# EAGLE board driver (EAGLE 9.6.1)
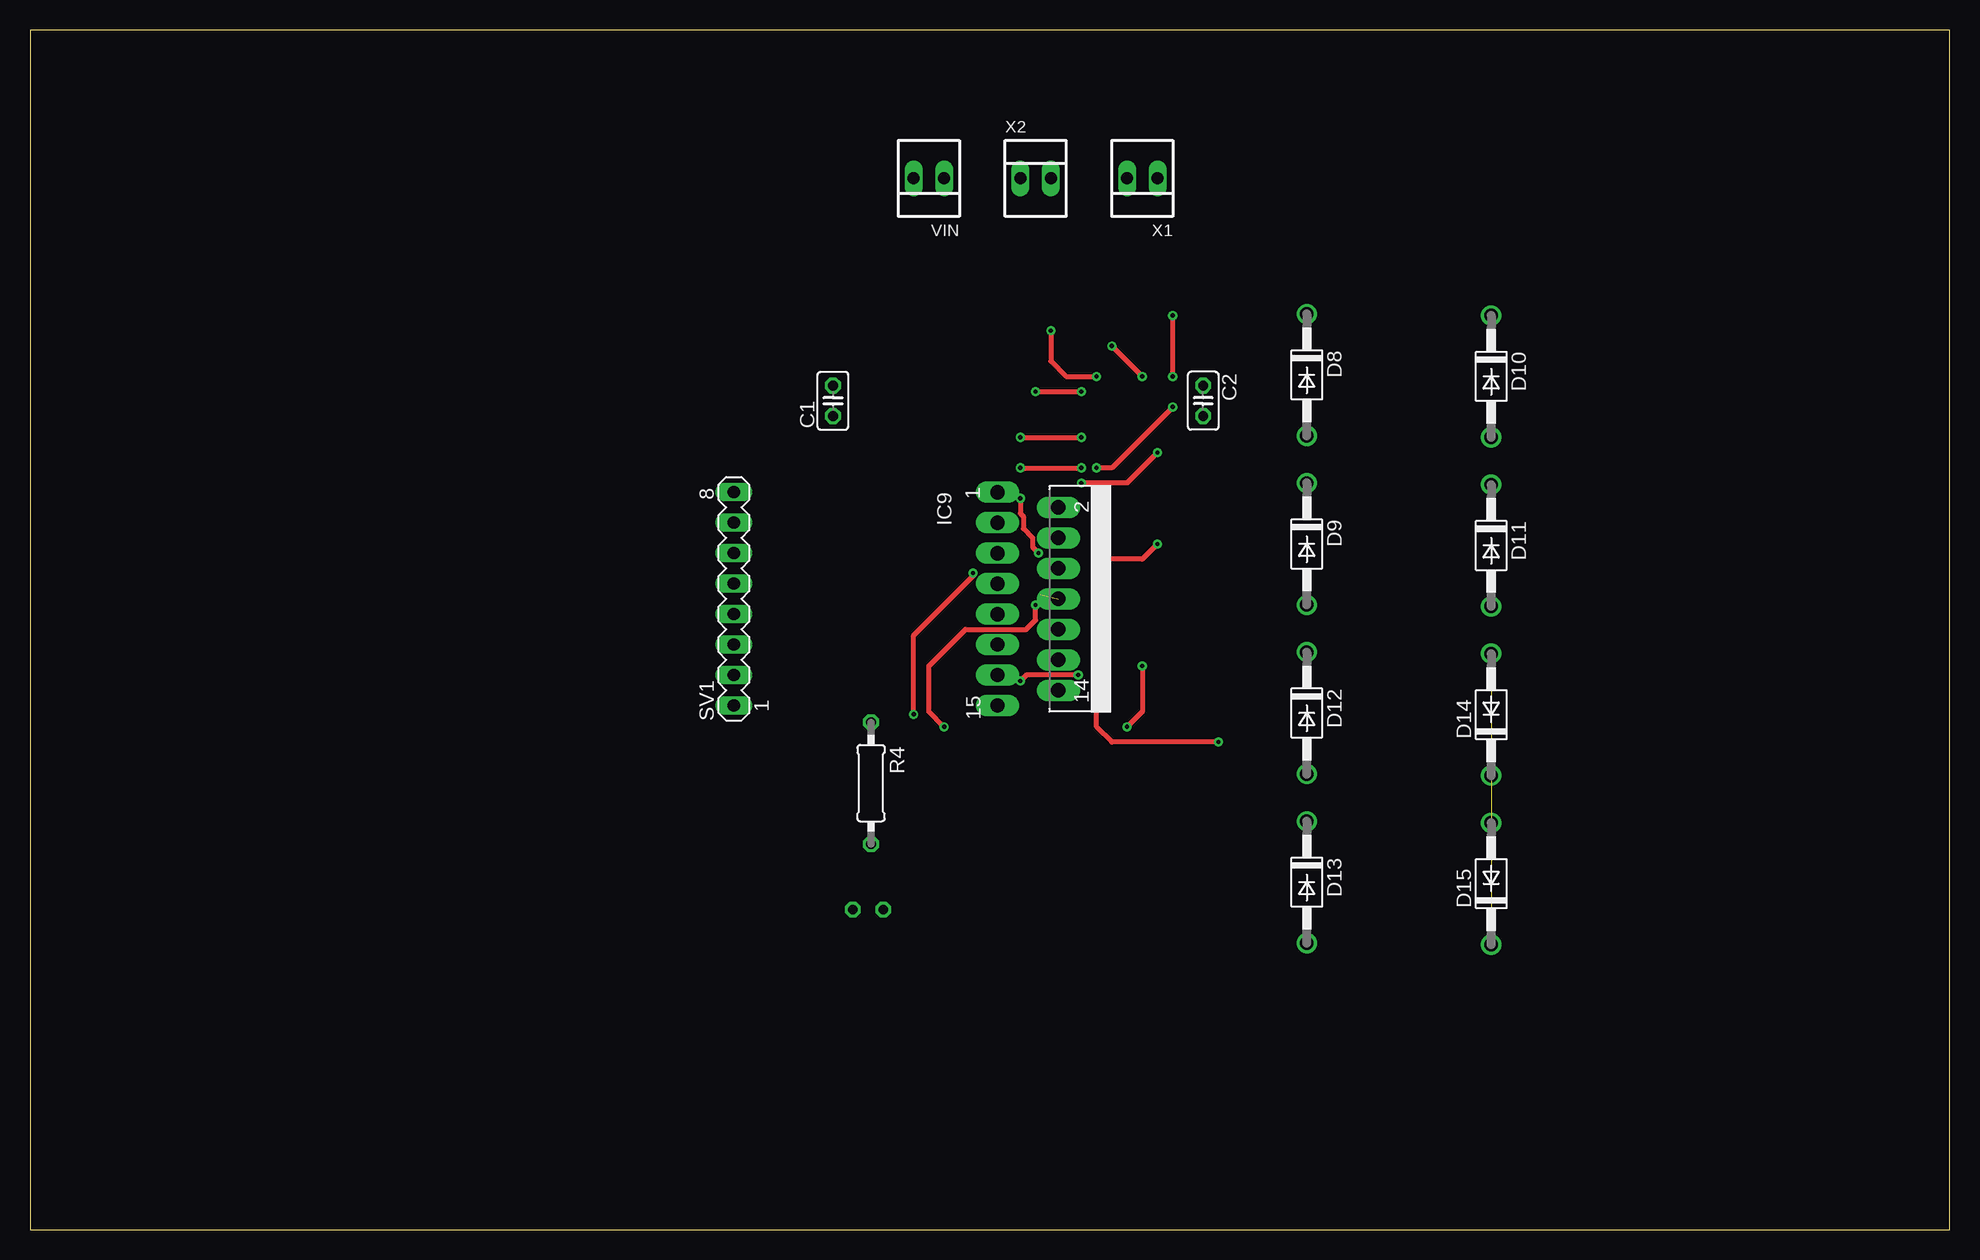
[diagram p0: board, top side]
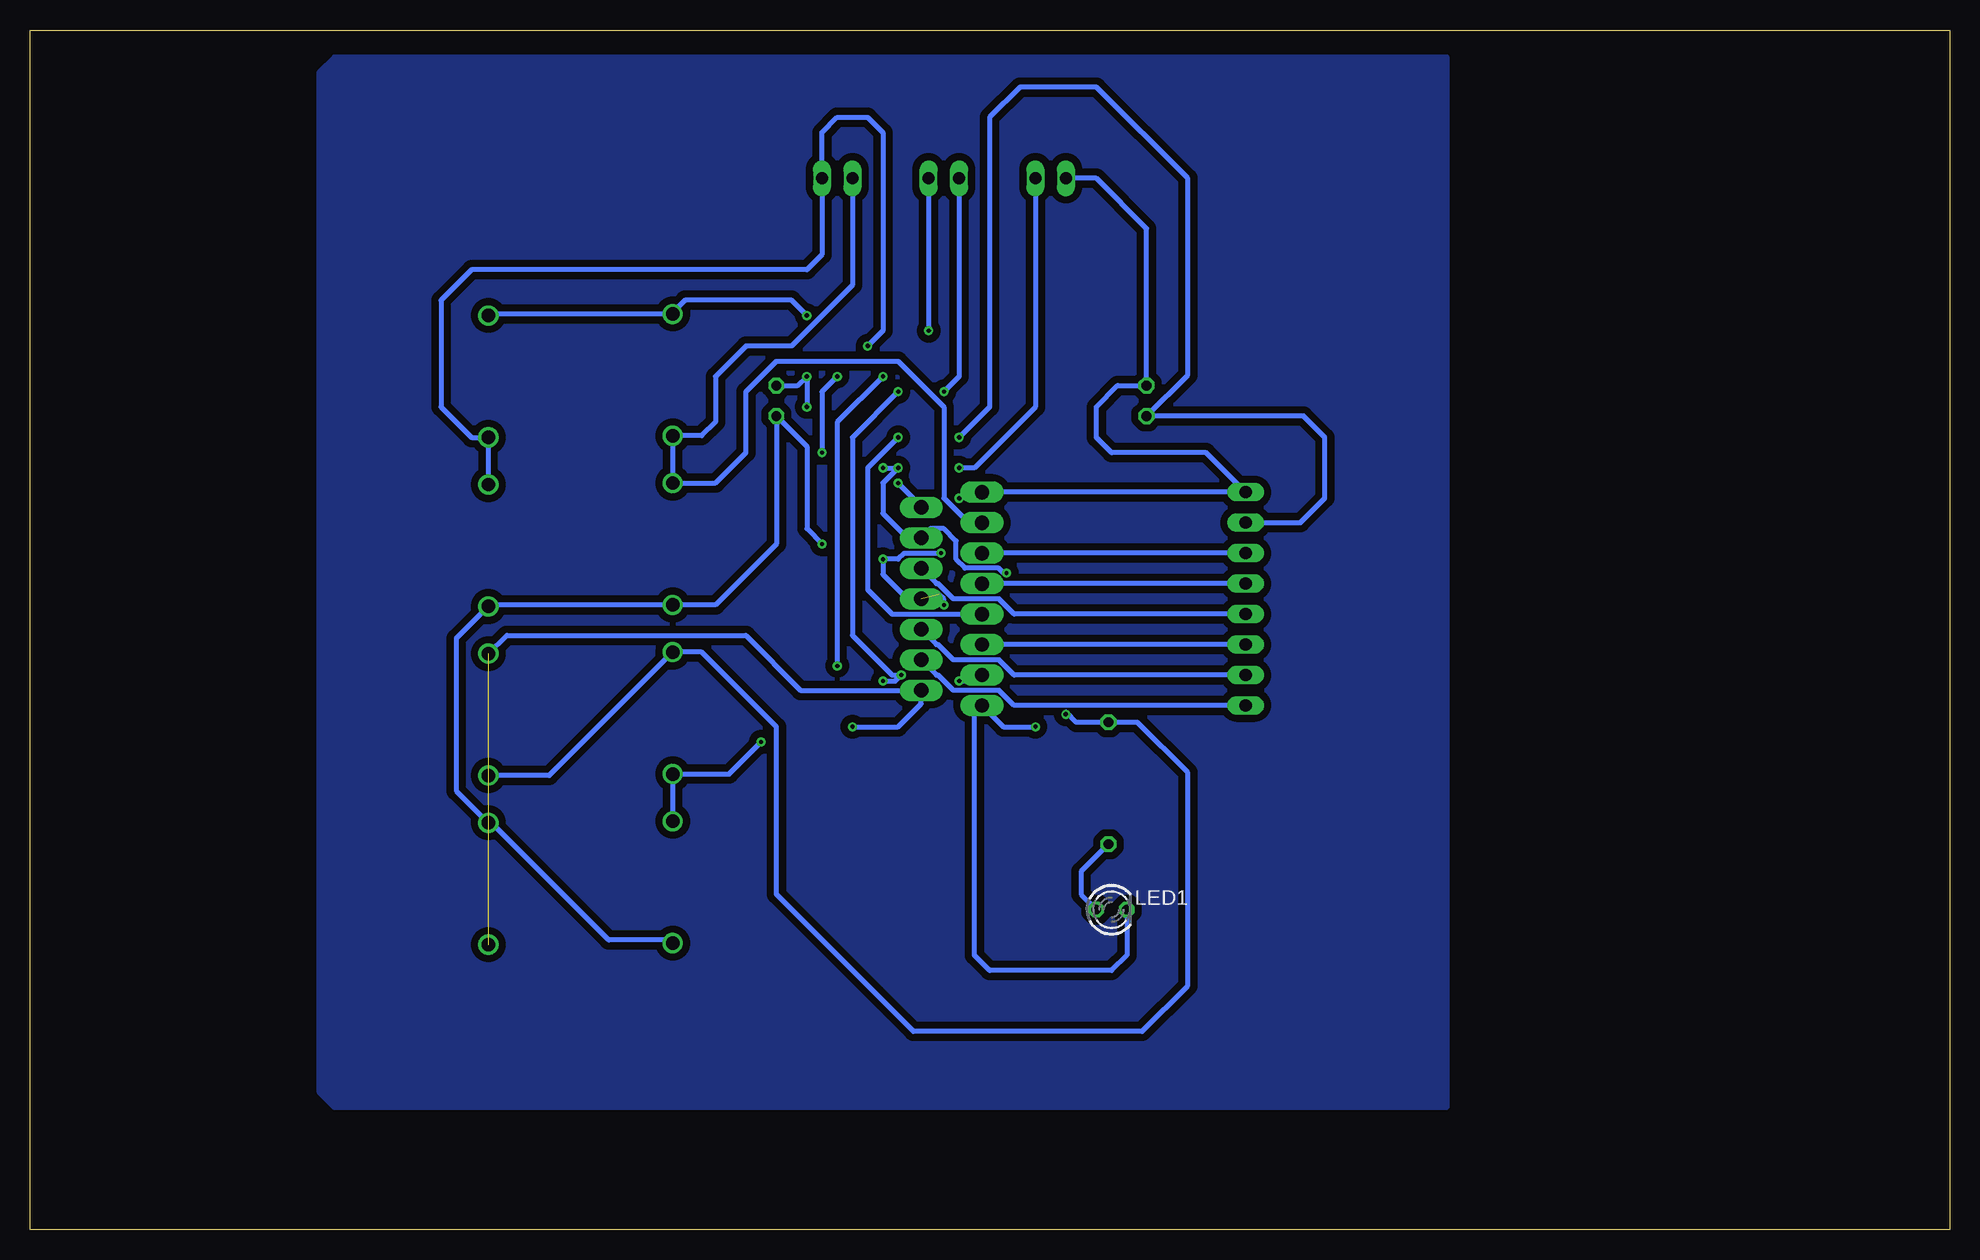
[diagram p1: board, bottom side, seen from below]

Size 160 x 100 mm. Coordinates in mm from the lower left corner, seen from the top.
Outline: 0,0 160,0 160,100 0,100 0,0
Copper layers (1*16): Top 0.035mm / dielectric 1.5mm / Bottom 0.035mm
Design rules "default": minimum track width 6mil, minimum drill 0.35mm, track to track 6mil, track to pad 6mil, pad to pad 6mil, via to via 6mil, smd to smd 6mil, copper to edge 40mil, drill to drill 6mil, minimum pad ring 10mil, minimum via ring 8mil, stop-mask expansion 4mil, vias tented up to drill 0mil, thermal gap 10mil

## Footprints (pad centres in the part's own frame; a part is rotated, then mirrored left to right if it is on the bottom)
C025-025X050 = drill 0.813 octagon: 1 -1.27,0; 2 1.27,0
DO41-10 = drill 1.118: A 5.08,0; C -5.08,0
MULTIWATT-15 = drill 1.2 long: 1 -8.89,-7.62; 2 -7.62,-2.54; 3 -6.35,-7.62; 4 -5.08,-2.54; 5 -3.81,-7.62; 6 -2.54,-2.54; 7 -1.27,-7.62; 8 0,-2.54; 9 1.27,-7.62; 10 2.54,-2.54; 11 3.81,-7.62; 12 5.08,-2.54; 13 6.35,-7.62; 14 7.62,-2.54; 15 8.89,-7.62
LED3MM = drill 0.813 octagon: A -1.27,0; K 1.27,0
0207/10 = drill 0.813 octagon: 1 -5.08,0; 2 5.08,0
MA08-1 = drill 1.016 long: 1 -8.89,0; 2 -6.35,0; 3 -3.81,0; 4 -1.27,0; 5 1.27,0; 6 3.81,0; 7 6.35,0; 8 8.89,0
22-23-2021 = drill 1 long: 1 -1.27,0; 2 1.27,0

## Placement (x,y rotation side)
C1  100nF  [C025-025X050]  66.93,69.09 90 top
C2  100nF  [C025-025X050]  97.79,69.09 270 top
D8  1N4004  [DO41-10]  106.43,71.25 270 top
D9  1N4004  [DO41-10]  106.43,57.15 270 top
D10  1N4004  [DO41-10]  121.79,71.12 270 top
D11  1N4004  [DO41-10]  121.79,57.02 270 top
D12  1N4004  [DO41-10]  106.43,43.05 270 top
D13  1N4004  [DO41-10]  106.43,28.96 270 top
D14  1N4004  [DO41-10]  121.79,42.93 90 top
D15  1N4004  [DO41-10]  121.79,28.83 90 top
IC9  L298  [MULTIWATT-15]  88.27,52.58 270 top
LED1  [LED3MM]  69.85,26.67 0 bottom
R4  330  [0207/10]  70.1,37.21 270 top
SV1  [MA08-1]  58.67,52.58 90 top
VIN  22-23-2021  [22-23-2021]  74.93,87.63 180 top
X1  22-23-2021  [22-23-2021]  92.71,87.63 180 top
X2  22-23-2021  [22-23-2021]  83.82,87.63 0 top

## Library data of the parts
C1 C2 R4 = rcl
D8-D15 = diode
IC9 = st-microelectronics
LED1 = led
SV1 = con-lstb; OC_FARNELL: unknown; OC_NEWARK: unknown
VIN X1 X2 = con-molex; MF: MOLEX; MPN: 22-23-2021; OC_FARNELL: 1462926; OC_NEWARK: 25C3832

## Nets
GND: C1.2 C2.2 D9.A D11.A D13.A D15.A IC9.1 IC9.8 IC9.15 LED1.K SV1.8 VIN.2
N$1: IC9.5 SV1.6
N$3: IC9.7 SV1.5
N$5: IC9.12 SV1.1
N$8: IC9.10 SV1.2
N$16: IC9.6 SV1.4
N$17: IC9.11 SV1.3
N$44: LED1.A R4.2
N$204: D8.A D9.C IC9.3 X1.2
N$205: D10.A D11.C IC9.2 X1.1
N$206: D12.A D13.C IC9.13 X2.1
N$207: D14.A D15.C IC9.14 X2.2
VCC: C1.1 IC9.9 SV1.7
VDD: C2.1 D8.C D10.C D12.C D14.C IC9.4 R4.1 VIN.1

## Tracks (layer width: path | path; a pad name or v marks a point on that pad's centre or on a via)
1
  pour Bottom (isolate 0.61): 41.91,96.52 41.91,10.16 134.62,10.16 135.89,11.43 135.89,96.52 134.62,97.79 41.91,97.79
GND  (via drill 0.35)  (1 unrouted)
  Top 0.406: v93.98,57.15 92.71,55.88 v88.9,55.88 | v82.55,60.96 82.55,59.7 82.8,59.45 82.8,58.42 83.56,57.66 83.56,56.9 v84.07,56.39 | v76.2,41.91 74.93,43.18 74.93,46.99 77.47,49.53 77.96,50.02 83.03,50.02 83.82,50.81 v83.82,52.07
  Bottom 0.406: LED1.K 68.58,22.86 69.85,21.59 80.01,21.59 81.28,22.86 81.28,43.05 IC9.15 78.87,41.91 v76.2,41.91 | VIN.2 71.12,87.63 66.93,83.44 C1.2 69.34,70.36 71.12,68.58 71.12,66.04 69.85,64.77 61.98,64.77 SV1.8 IC9.1 82.04,61.47 v82.55,60.96 | D13.A 106.68,24.13 111.76,24.13 121.54,33.91 D15.A 124.46,36.58 124.46,49.28 D11.A 121.67,52.07 D9.A 102.87,52.07 97.79,57.15 C2.2 95.25,65.28 95.25,58.42 v93.98,57.15 | IC9.8 86.87,52.58 88.9,54.61 v88.9,55.88 87.64,55.88 87.14,56.37 84.09,56.37 v84.07,56.39 | v83.82,52.07 83.82,52.56 84.21,52.95
N$1
  Bottom 0.406: SV1.6 IC9.5
N$3
  Bottom 0.406: SV1.5 IC9.7
N$5
  Bottom 0.406: IC9.12 84.44,46.21 84.31,46.21 83.03,44.94 79.22,44.94 77.97,43.69 SV1.1
N$8
  Bottom 0.406: IC9.10 84.44,48.75 84.31,48.75 83.03,47.48 79.22,47.48 77.97,46.23 SV1.2
N$16
  Bottom 0.406: IC9.6 84.44,53.83 84.31,53.83 83.03,52.56 79.22,52.56 77.97,51.31 SV1.4
N$17
  Bottom 0.406: SV1.3 IC9.11
N$44
  Bottom 0.406: R4.2 72.39,29.84 72.39,27.94 LED1.A
N$204
  Bottom 0.406: X1.2 91.44,78.74 96.52,73.66 100.33,73.66 102.87,71.12 102.87,67.31 104.01,66.17 D8.A D9.C 102.87,62.23 100.33,64.77 100.33,69.85 97.79,72.39 87.63,72.39 83.82,68.58 83.82,60.97 83.57,60.72 83.57,60.71 81.79,58.93 IC9.3
N$205  (via drill 0.35)
  Top 0.406: v90.17,73.66 v92.71,71.12 | v93.98,64.77 91.44,62.23 v87.63,62.23
  Bottom 0.406: D11.C D10.A 123.19,66.04 125.73,68.58 125.73,77.47 123.19,80.01 95.25,80.01 93.98,81.28 X1.1 93.98,91.44 92.71,92.71 90.17,92.71 88.9,91.44 88.9,74.93 v90.17,73.66 | v92.71,71.12 93.98,69.85 v93.98,64.77 | v87.63,62.23 85.72,60.33 IC9.2
N$206  (via drill 0.35)
  Top 0.406: v83.82,69.85 v87.63,69.85 | v87.38,46.23 83.06,46.23 v82.55,45.72 | v99.06,40.64 90.17,40.64 88.9,41.91 v88.9,45.72
  Bottom 0.406: X2.1 82.55,71.12 v83.82,69.85 | D13.C D12.A 101.73,37.97 v99.06,40.64 | v87.63,69.85 91.44,66.04 91.44,49.53 88.14,46.23 | 88.14,46.23 88.12,46.21 | 88.14,46.23 v87.38,46.23 87.89,45.72 v88.9,45.72 | v82.55,45.72 81.15,45.72 IC9.13
N$207  (via drill 0.35)  (1 unrouted)
  Top 0.406: v85.09,74.93 85.09,72.39 86.36,71.12 v88.9,71.12 | v92.71,46.99 92.71,43.18 v91.44,41.91
  Bottom 0.406: D14.A 120.27,49.53 100.33,49.53 95.76,44.96 IC9.14 85.72,43.81 87.63,41.91 v91.44,41.91 | X2.2 v85.09,74.93 | v88.9,71.12 92.71,67.31 v92.71,46.99
VCC  (via drill 0.35)
  Top 0.406: v82.55,66.04 v87.63,66.04
  Bottom 0.406: SV1.7 54.1,58.93 52.07,60.96 52.07,66.04 53.85,67.82 C1.1 63.5,71.25 63.5,87.63 71.12,95.25 77.47,95.25 80.01,92.71 80.01,68.58 v82.55,66.04 | v87.63,66.04 90.17,63.5 90.17,53.34 88.14,51.31 IC9.9
VDD  (via drill 0.35)
  Top 0.406: v82.55,63.5 v87.63,63.5 | v95.25,71.12 v95.25,76.2 | v95.25,68.58 90.17,63.5 v88.9,63.5 | v73.66,42.95 73.66,49.54 78.74,54.61 v78.61,54.74
  Bottom 0.406: D10.C 121.67,76.33 D8.C 106.43,76.45 105.41,77.47 96.52,77.47 v95.25,76.2 | D14.C 116.71,37.85 D12.C 104.01,48.13 97.79,41.91 97.79,27.94 86.36,16.51 67.31,16.51 63.5,20.32 63.5,38.1 67.69,42.29 R4.1 72.77,42.29 73.61,43.13 73.66,43.13 v73.66,42.95 | v82.55,63.5 81.28,63.5 76.2,68.58 VIN.1 | C2.1 96.01,70.36 v95.25,71.12 v95.25,68.58 | v88.9,63.5 v87.63,63.5 88.9,62.23 88.9,59.69 86.87,57.66 IC9.4 84.96,58.42 83.82,58.42 82.8,57.4 82.8,55.87 82.06,55.13 79.25,55.13 78.86,54.74 v78.61,54.74